# Altium PCB PCB1.PcbDoc
Units mm, origin at the board's own origin, x right, y up, seen from the top; angles counter-clockwise.
Board outline 65 x 50 mm, 2 copper layers (Top Layer, Bottom Layer), stack 1.58 mm thick; 67 components, 42 nets, 254 pads, 138 vias.
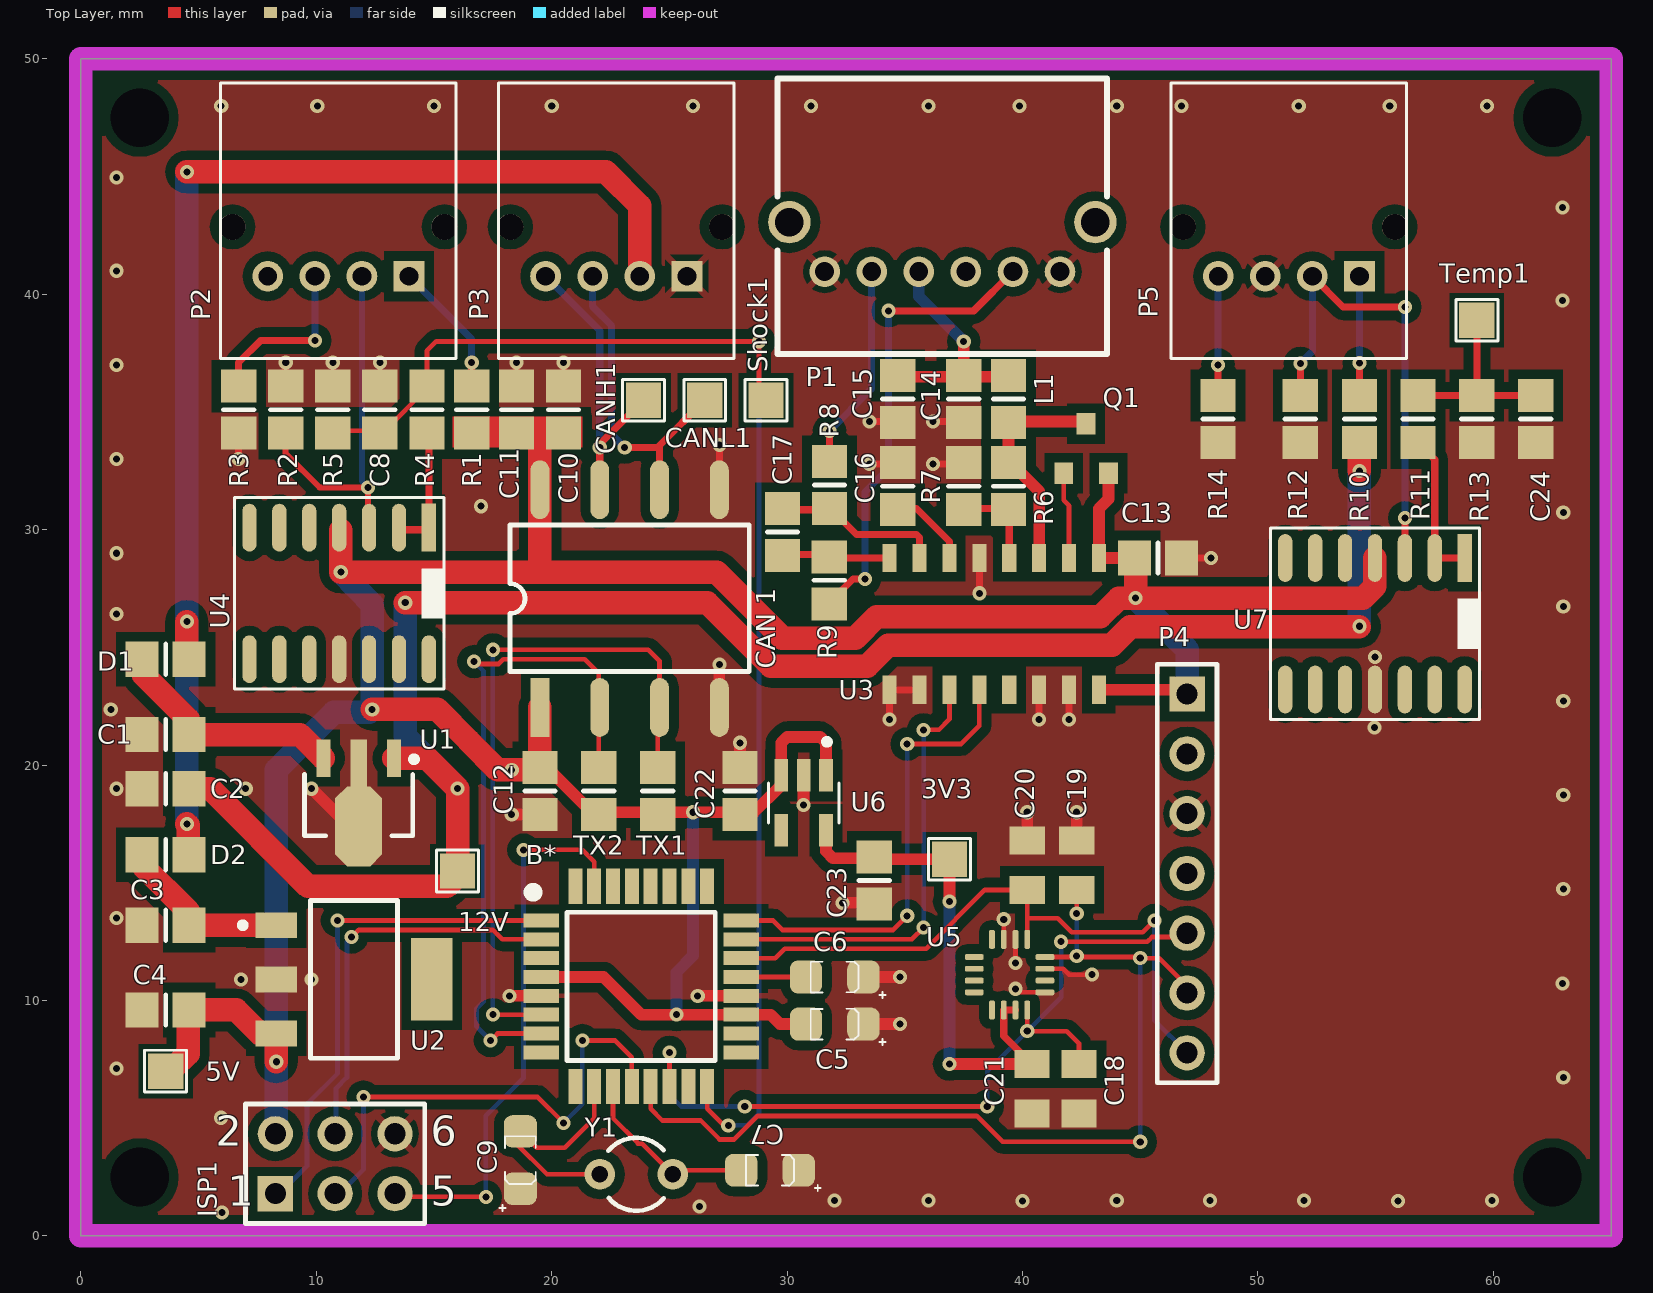
[diagram p0: Top Layer view]
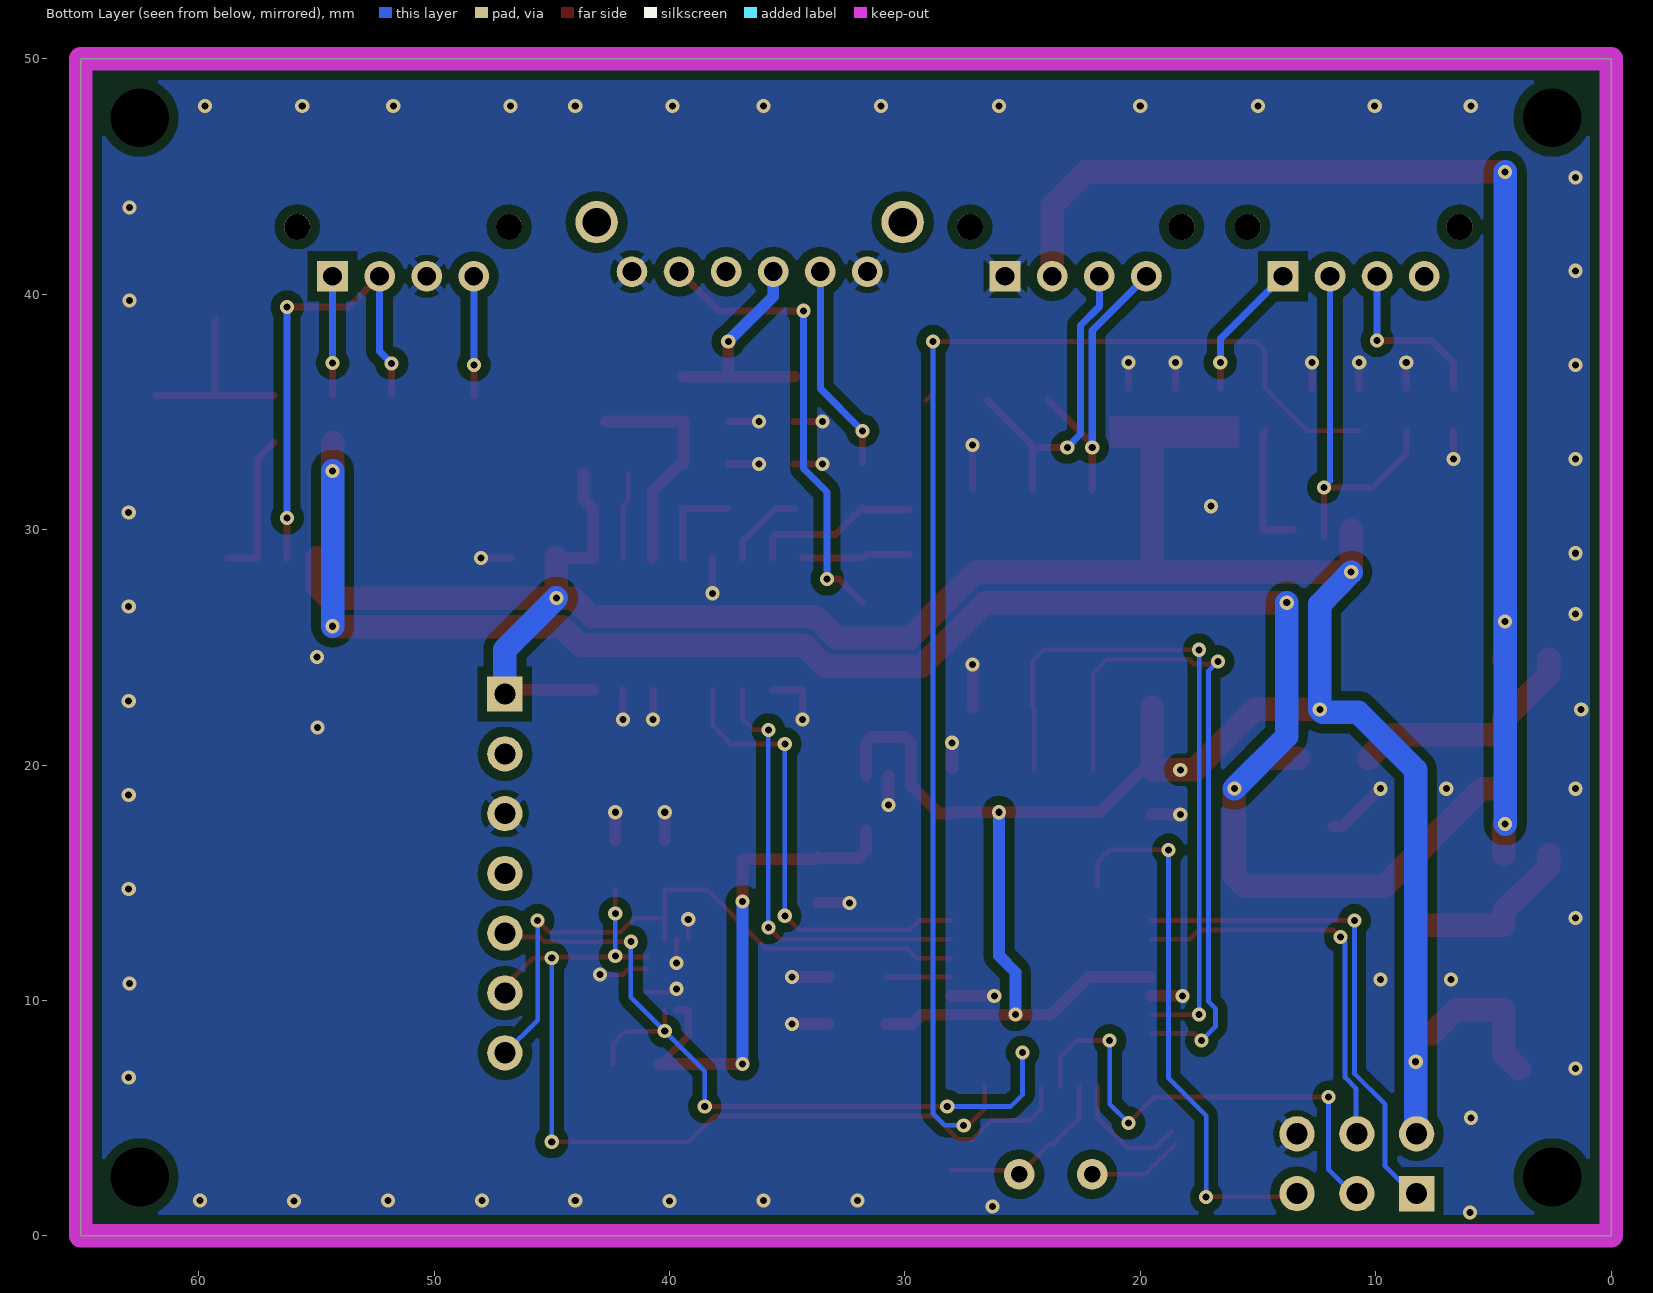
[diagram p1: Bottom Layer view, seen from below]

## Layer stack, top to bottom
Top Solder: solder mask 0.0102, Solder Resist, Dk 3.5
Top Layer: signal copper 0.0356
Dielectric 1: core 1.5086, FR-4, Dk 4.2
Bottom Layer: signal copper 0.0356
Bottom Solder: solder mask 0.0102, Solder Resist, Dk 3.5

## Board outline
0,0 65,0 65,50 0,50

## Design rules (kind name [scope] priority, off if disabled: settings)
BoardOutlineClearance [All] p1: gap=0.4 ignorepadtopadclearanceinfootprint=FALSE
Clearance Clearance_1 [InPolygon] p1: gap=0.4 ignorepadtopadclearanceinfootprint=TRUE
Clearance [All] p2: gap=0.2 ignorepadtopadclearanceinfootprint=FALSE
HoleSize [All] p1: absolutevalues=TRUE maxlimit=5 minlimit=0.025 maxpercent=80.000 minpercent=20.000
MinimumSolderMaskSliver [All] p1: minsoldermaskwidth=0.1
PolygonConnect [All] p1: thpad.connectstyle=Relief thpad.reliefconductorwidth=0.3 thpad.reliefentries=4 thpad.polygonreliefangle="45 Angle" thpad.airgapwidth=0.254 smdpad.connectstyle=Direct smdpad.reliefconductorwidth=0.254 smdpad.reliefentries=4 smdpad.polygonreliefangle="90 Angle" smdpad.airgapwidth=0.254 via.connectstyle=Direct via.reliefconductorwidth=0.254 via.reliefentries=4 via.polygonreliefangle="90 Angle" via.airgapwidth=0.254
RoutingVias [All] p1: holewidth=0.3 width=0.6 viastyle="Through Hole" minholewidth=0.3 minwidth=0.6 maxholewidth=0.3 maxwidth=0.6
SilkToSilkClearance [All] p1: silktosilkclearance=0.1
SilkToSolderMaskClearance [IsPad] p1: minsilkscreentomaskgap=0.1 clearancetoexposedcopper=TRUE
SolderMaskExpansion [All] p1: expansion=0.102
UnpouredPolygon [All] p1: allowunpoured=TRUE
Width [All] p1: maxlimit=1 minlimit=0.2 preferedwidth=0.5
25 further rules are at their usual default settings.

## Components (designator, comment, footprint, x,y, rotation, side; value= is the part's Value field where it differs from the comment)
3V3 "TP" SMD_TP 36.9,16 r0 top
5V "TP" SMD_TP 3.6,7 r90 top
12V "TP" SMD_TP 16,15.5 r270 top
B* "ATMEGA32M1" QFP80P900X900X120-32N 23.802,10.6 r0 top
C1 "0.33uF" 6-0805_M 3.6,21.3 r180 top
C2 "0.1uF" 6-0805_M 3.6,19 r180 top
C3 "0.22uF" 6-0805_M 3.6,13.2 r180 top
C4 "0.1uF" 6-0805_M 3.6,9.6 r180 top
C5 "Cap" CAP-0805 32.019,9 r270 top value=100nF
C6 "Cap" CAP-0805 32.019,11 r270 top value=10nF
C7 "Cap" CAP-0805 29.271,2.794 r270 top value=22pF
C8 "10nF" 6-0805_M 12.7,35.1 r90 top
C9 "Cap" CAP-0805 18.669,3.224 r180 top value=22pF
C10 "100nF" 6-0805_M 20.5,35.1 r90 top
C11 "1uF" 6-0805_M 18.5,35.1 r90 top
C12 "100nF" 6-0805_M 19.5,18.9 r270 top
C13 "0.1uF" 6-0805_M 45.75,28.8 r0 top
C14 "0.1uF" 6-0805_M 37.5,35.55 r270 top
C15 "0.1uF" 6-0805_M 34.7,35.55 r270 top
C16 "0.1uF" 6-0805_M 34.7,31.85 r270 top
C17 "0.1uF" 6-0805_M 29.8,29.9 r270 top
C18 "0.1uF" 0805_10MGAP 42.4,6.25 r270 top
C19 "0.1uF" 0805_10MGAP 42.3,15.75 r90 top
C20 "0.1uF" 0805_10MGAP 40.2,15.75 r90 top
C21 "0.1uF" 0805_10MGAP 40.4,6.25 r270 top
C22 "10uF" 6-0805_M 28,18.9 r90 top
C23 "10uF" 6-0805_M 33.7,15.1 r270 top
C24 "10nF" 6-0805_M 61.8,34.7 r270 top
"CAN 1" "ISO1050" ISO1050 19.5,22.45 r90 top
CANH1 "TP" SMD_TP 23.9,35.5 r90 top
CANL1 "TP" SMD_TP 26.5,35.5 r90 top
D1 "Diode" 6-0805_M 3.6,24.5 r180 top
D2 "Diode" 6-0805_M 3.6,16.2 r180 top
ISP1 "AVRISP-BOX" HDR2X3 8.26,1.8 r0 top
L1 "3.3uH" 6-0805_M 39.4,35.55 r270 top
P1 "S06B-PASK-2" JST_S06B-PASK-2 29.592,49.165 r0 top
P2 "S04B-PASK-2(LF)(SN)" JST_S04B-PASK-2(LF)(SN) 10.938,40.767 r0 top
P3 "S04B-PASK-2(LF)(SN)" JST_S04B-PASK-2(LF)(SN) 22.74,40.767 r0 top
P4 "Header 7" HDR1X7 46.99,23.02 r270 top
P5 "S04B-PASK-2(LF)(SN)" JST_S04B-PASK-2(LF)(SN) 51.31,40.767 r0 top
Q1 "MMBT4403" SOT23-3 42.7,33.4 r0 top
R1 "Res2" 6-0805_M 16.6,35.1 r270 top value=100R
R2 "Res2" 6-0805_M 8.7,35.1 r270 top value=470K
R3 "Res2" 6-0805_M 6.7,35.1 r90 top value=100R
R4 "Res2" 6-0805_M 14.7,35.1 r270 top value=6K8
R5 "Res2" 6-0805_M 10.7,35.1 r270 top value=12K
R6 "10K" 6-0805_M 39.4,31.85 r90 top
R7 "10K" 6-0805_M 37.5,31.85 r270 top
R8 "10K" 6-0805_M 31.8,31.9 r270 top
R9 "10K" 6-0805_M 31.792,27.85 r90 top
R10 "Res2" 6-0805_M 54.31,34.7 r270 top value=100R
R11 "" 6-0805_M 56.8,34.7 r270 top value=6K8
R12 "Res2" 6-0805_M 51.8,34.7 r90 top value=470K
R13 "Res2" 6-0805_M 59.3,34.7 r90 top value=12K
R14 "Res2" 6-0805_M 48.3,34.7 r90 top value=100R
Shock1 "TP" SMD_TP 29.1,35.5 r90 top
Temp1 "TP" SMD_TP 59.3,38.9 r90 top
TX1 "Res2" 6-0805_M 24.5,18.9 r270 top value=10K
TX2 "Res2" 6-0805_M 22,18.9 r270 top value=10K
U1 "L78L12ABUTR" SOT-89_M 11.8,18.3 r270 top
U2 "LM7805" SOT-223-2 11.6,10.9 r270 top
U3 "HX711" SO16 38.8,26 r180 top
U4 "TLV2464" SO14 14.78,30.088 r270 top
U5 "ADXL377" LFCSP16_LQ 39.45,11.1 r180 top
U6 "MIC5225-3.3" SOT95P280X145-5N 30.7,18.4 r270 top
U7 "TLV2464" SO14 58.78,28.8 r270 top
Y1 "XTAL = 8MHz" R38 23.596,2.62 r270 top

## Footprints (in the part's own frame and the unit in brackets; to place one, negate y for a bottom-side part, rotate by r counter-clockwise, add the part's x,y. Pads: shape width x height; smd on the part's side, far side on the other; paste and mask are expansions set on the pad)
6-0805_M [mm] "Chip Resistor, Body 2.0x1.2mm, IPC Low Density"
  rect 1.4x1.5 smd: 1(-1,0) 2(1,0)
  silkscreen extent 0,-0.65 0,0.65, body extent -1.07,-0.7 1.07,0.7, height 0.7
0805_10MGAP [mm]
  rect 1.2x1.5 smd: 1(-1.05,0) 2(1.05,0)
  body extent -1,-0.66 1,0.65, height 0.73
CAP-0805 [mil]
  rrect50% 55x54 smd: 1(0,48) 2(0,-48)
  silkscreen extent -26,-40 35,85, body extent -26,-40 26,40, height 22
HDR1X7 [mm] "Connector; Header; 7 Position"
  rect 1.5x1.5 hole 0.9: 1(0,0)
  round 1.5 hole 0.9: 2(2.54,0) 3(5.08,0) 4(7.62,0) 5(10.16,0) 6(12.7,0) 7(15.24,0)
  silkscreen extent -1.27,-1.27 16.51,1.27
HDR2X3 [mm] "Connector; Header; 3x2 Position"
  rect 1.5x1.5 hole 0.9: 1(0,0)
  round 1.5 hole 0.9: 2(0,2.54) 3(2.54,0) 4(2.54,2.54) 5(5.08,0) 6(5.08,2.54)
  silkscreen extent -1.27,-1.27 6.35,3.81
ISO1050 [mm] "ISO1050 Isolated Can Transceiver"
  rect 2.5x0.8 smd: 1(0,0)
  oval 2.5x0.8 smd: 2(0,-2.54) 3(0,-5.08) 4(0,-7.62) 5(9.25,-7.62) 6(9.25,-5.08) 7(9.25,-2.54) 8(9.25,0)
  silkscreen extent 1.52,-8.89 7.75,1.27, body extent 1.5,-8.9 7.7,1.3, height 5.08
JST_S04B-PASK-2(LF)(SN) [mm]
  rect 1.308x1.308 hole 0.8: 1(3,0)
  round 1.308 hole 0.8: 2(1,0) 3(-1,0) 4(-3,0)
  round 1.1 hole 1.1 unplated: None(-4.5,2.1) None(4.5,2.1)
  silkscreen extent -5,-3.5 5,8.2, body extent -4.93,-3.54 5.07,8.16, height 6.5
JST_S06B-PASK-2 [mm]
  round 1.3 hole 0.8: 1(2,-8.2) 2(4,-8.2) 3(6,-8.2) 4(8,-8.2) 5(10,-8.2) 6(12,-8.2)
  round 1.8 hole 1.2: 7(0.5,-6.1) 8(13.5,-6.1)
  silkscreen extent 0,-11.7 14,0, body extent 0.05,-11.68 14.05,0.02, height 6.5
LFCSP16_LQ [mil] "LFCSP16_LQ"
  rrect60% 31.5x9.84 smd: 1(-59.07,29.53) 2(-59.07,9.84) 3(-59.07,-9.84) 4(-59.07,-29.53) 9(59.07,-29.53) 10(59.07,-9.84) 11(59.07,9.84) 12(59.07,29.53)
  rrect60% 9.84x31.5 smd: 5(-29.53,-59.07) 6(-9.84,-59.07) 7(9.84,-59.07) 8(29.53,-59.07) 13(29.53,59.07) 14(9.84,59.07) 15(-9.84,59.07) 16(-29.53,59.07)
  body extent -60,-58 58,61, height 38
QFP80P900X900X120-32N [mm]
  rect 1.5x0.6 smd: 1(-4.25,2.8) 2(-4.25,2) 3(-4.25,1.2) 4(-4.25,0.4) 5(-4.25,-0.4) 6(-4.25,-1.2) 7(-4.25,-2) 8(-4.25,-2.8) 17(4.25,-2.8) 18(4.25,-2) 19(4.25,-1.2) 20(4.25,-0.4) 21(4.25,0.4) 22(4.25,1.2) 23(4.25,2) 24(4.25,2.8)
  rect 0.6x1.5 smd: 9(-2.8,-4.25) 10(-2,-4.25) 11(-1.2,-4.25) 12(-0.4,-4.25) 13(0.4,-4.25) 14(1.2,-4.25) 15(2,-4.25) 16(2.8,-4.25) 25(2.8,4.25) 26(2,4.25) 27(1.2,4.25) 28(0.4,4.25) 29(-0.4,4.25) 30(-1.2,4.25) 31(-2,4.25) 32(-2.8,4.25)
  silkscreen extent -4.8,-3.15 3.15,4.2, body extent -4.87,-4.73 4.73,4.87, height 1.13
R38 [mm] "Crystal, Thru-Hole; 2 Leads; Body 3.1 x 8.2 mm (Dia.xH)"
  round 1.3 hole 0.7: 1(0,1.55) 2(0,-1.55)
  silkscreen extent -1.55,-1.19 1.55,1.17
SMD_TP [mm]
  rect 1.5x1.5 smd: 1(0,0)
  silkscreen extent -0.89,-0.89 0.89,0.89
SO14 [mil]
  rect 80x24 smd: 1(0,0)
  oval 80x24 smd: 2(0,-50) 3(0,-100) 4(0,-150) 5(0,-200) 6(0,-250) 7(0,-300) 8(220,-300) 9(220,-250) 10(220,-200) 11(220,-150) 12(220,-100) 13(220,-50) 14(220,0)
  silkscreen extent -50,-325 270,26, body extent -20,-325 240,25, height 61
SO16 [mm] "SO16"
  rect 0.6x1.2 smd: 1(-4.445,-2.8) 2(-3.175,-2.8) 3(-1.905,-2.8) 4(-0.635,-2.8) 5(0.635,-2.8) 6(1.905,-2.8) 7(3.175,-2.8) 8(4.445,-2.8) 9(4.445,2.8) 10(3.175,2.8) 11(1.905,2.8) 12(0.635,2.8) 13(-0.635,2.8) 14(-1.905,2.8) 15(-3.175,2.8) 16(-4.445,2.8)
  body extent -4.98,-3.34 5.02,3.36, height 1.52
SOT23-3 [mil] "SOT23-3"
  rect 31.5x35.43 smd: 1(-37.4,-39.37) 2(37.4,-39.37) 3(0,43.31)
  body extent -54,-53 60,57, height 51
SOT95P280X145-5N [mm]
  rect 1.39x0.58 smd: 1(-1.165,0.95) 2(-1.165,0) 3(-1.165,-0.95) 4(1.165,-0.95) 5(1.165,0.95)
  silkscreen extent -2.69,-1.5 0.85,1.5, body extent -1.12,-1.5 1.38,1.5, height 1.06
SOT-89_M [mm] "SOT89, 3-Leads, Body 4.5x2.4 mm, Pitch 1.5mm, Lead Span 4.1mm, IPC Low Density"
  rect 1.6x0.6 smd: 1(-2,1.5) 3(-2,-1.5)
  rect 2x0.7 smd: 2(-1.8,0)
  oct 3.4x2 smd: 2(0.9,0)
  silkscreen extent -2.07,-2.3 1.3,2.48, body extent -1.3,-2.3 1.3,2.3, height 1.6
SOT-223-2 [mm] "SOT-223/SC-73; 4 Leads; Body 6.7 x 7.3 mm, inc. leads (LxW max)"
  rect 1.1x1.75 smd: 1(-2.3,-3.3) 2(0,-3.3) 3(2.3,-3.3)
  rect 3.5x1.75 smd: 4(0,3.3)
  silkscreen extent -3.35,-4.85 3.35,1.85, body extent -3.35,-3.7 3.35,3.5, height 1.85

## Part data
3V3 5V 12V CANH1 CANL1 Shock1 Temp1: library part Plug, "Test Point", LatestRevisionDate=17-Jul-2002, LatestRevisionNote="Re-released for DXP Platform.", Publisher="Altium Limited"
C1 C2 C3 C4 C13 C14 C15 C16 C17 C22 C23: library part CAP_CERAMIC0805-NOOUTLINE, "Ceramic CapacitorsFor new designs, use the packages preceded by an '_' character since they are more reliable:The following footprints should be used on most boards:For extremely tight-pitch boards where space is at a premium, the following 'micro-pitch' footprints can be used (smaller pads, no silkscreen outline, etc.):", DeviceName=0805-NOOUTLINE, DeviceSetName=CAP_CERAMIC, GateName_1=G$1, LibraryName=microbuilder, SymbolName_1=CAPACITOR
C5 C6 C7 C9: "Capacitor", LatestRevisionDate=17-Jul-2002, LatestRevisionNote="Re-released for DXP Platform.", PackageDescription="Radial Cap, Thru-Hole; 2 Leads; 0.3 in Pin Spacing", PackageReference=RAD-0.3, Published=8-Jun-2000, Publisher="Altium Limited"
C8 C10 C11 C12 C24: library part "Cap Pol3", "Polarized Capacitor (Surface Mount)", LatestRevisionDate=29-May-2009, LatestRevisionNote="IPC-7351 Footprint Added.", PackageDescription="Chip Capacitor", PackageReference=C0805, Published=8-Jun-2000, Publisher="Altium Limited"
C18 C19 C20 C21: library part CAP_CERAMIC0805_10MGAP, "Ceramic CapacitorsFor new designs, use the packages preceded by an '_' character since they are more reliable:The following footprints should be used on most boards:For extremely tight-pitch boards where space is at a premium, the following 'micro-pitch' footprints can be used (smaller pads, no silkscreen outline, etc.):", DeviceName=0805_10MGAP, DeviceSetName=CAP_CERAMIC, GateName_1=G$1, LibraryName=microbuilder, SymbolName_1=CAPACITOR
"CAN 1": "ISO1050 Isolated Can Transceiver", Supplier Part Number 1=1755712, Supplier 1=Farnell
D1 D2: "Default Diode", Code_JEDEC=DO-214-AB, LatestRevisionDate=17-Jul-2002, LatestRevisionNote="Re-released for DXP Platform.", PackageDescription="DO-214-AB/SMC; 2 C-Bend Leads; Body 7.9 x 5.9 mm, inc. leads (LxW)", PackageReference=SMC, PackageVersion=Sep-1996, Published=8-Jun-2000, Publisher="Altium Limited"
ISP1: "AVR ISP HEADERStandard 6 pin header for AVR programming", Colour=Black, Manufacturer="Wurth Electronics", Manufacturer Part Number=61200621621, Supplier Part Number 1=710-61200621621, ComponentLink1Description=https://datasheet.ciiva.com/28391/76595-28391937.pdf, ComponentLink1URL=https://datasheet.ciiva.com/28391/76595-28391937.pdf, Connector Type="Male Pin", Contact Material=Copper, Contact Plating=Gold, DeviceName=-BOX, DeviceSetName=AVRISP, GateName_1=G$1, Gender=Male, LibraryName=adafruit, Mount="Through Hole", Number of Contacts=6, Number of Positions=6, Number of Rows=2, Packaging=Tray, Pitch=0.1inch, Pricing 1="1=0.82, 10=0.74, 50=0.62, 100=0.535, 1000=0.366, 10000=0.366 (USD)", REACH SVHC=Unknown, Row Spacing=0.1inch, Stock 1=708, Supplier 1=Mouser, SymbolName_1=AVRISP, Termination=Solder
L1: library part INDUCTOR0805-IND, "InductorsBasic Inductor/Choke - 0603 and 1206. Footprints are not proven and vary greatly between part numbers.INDUCTOR POWER 3.3UH 4.0A SMD0.197\" L x 0.197\" W x 0.177\" H (5.00mm x 5.00mm x 4.50mm)", DeviceName=0805-IND, DeviceSetName=INDUCTOR, GateName_1=G$1, LibraryName=SparkFun-Passives, PROD_ID=NDUC-13076, SymbolName_1=INDUCTOR
P1: library part JST-S06B-PASK-2, "JST (JAPAN SOLDERLESS TERMINALS) - S06B-PASK-2 - HEADER, PA, 6WAY, SIDE, 2MM", Manufacturer_Name="JST (JAPAN SOLDERLESS TERMINALS)", Arrow Part Number=S06B-PASK-2, Datasheet Link=https://www.google.at/url?sa=t&rct=j&q=&esrc=s&source=web&cd=4&cad=rja&uact=8&ved=0ahUKEwjPh4aswZ_QAhUCbRQKHeV_BDkQFggvMAM&url=http%3A%2F%2Fwww.jst-mfg.com%2Fproduct%2Fpdf%2Feng%2FePA-F.pdf&usg=AFQjCNHIjr6tw3q-UCZFm2uwsNkZVsuEmQ&sig2=Xvk6c_Ei4q2HSUHpQHCoT, Manufacturer_Part_Number=S06B-PASK-2
P2 P3 P5: library part JST-S04B-PASK-2(LF)(SN), "PA Series 4 Position 2.0mm Through Hole Wire to Board Single Row Shrouded Header", Package=None, Availability=Good, MF=JST, MP=S04B-PASK-2_LF__SN_, Price="0.28 USD", SnapEDA_Link=https://www.snapeda.com/parts/S04B-PASK-2%2528LF%2529%2528SN%2529/JST%2520Sales%2520America%2520Inc/view-part/?ref=snap
P4: "Header, 7-Pin", LatestRevisionDate=17-Jul-2002, LatestRevisionNote="Re-released for DXP Platform.", Publisher="Altium Limited"
Q1: library part TRANSISTOR_PNPMMBT4403, "Generic PNP BJT  Double check pinouts against datasheets- not all devices are the same!MMBT3906 - 40V 200mA SOT-23 (TRANS-08052)MMBT4403 - 40V 600mA SOT-23 (TRANS-09245)", DeviceName=MMBT4403, DeviceSetName=TRANSISTOR_PNP, GateName_1=G$1, LibraryName=SparkFun-DiscreteSemi, PROD_ID=TRANS-09245, SymbolName_1=PNP
R1 R2 R3 R4 R5 R10 R12 R13 R14 TX1 TX2: "Resistor", LatestRevisionDate=17-Jul-2002, LatestRevisionNote="Re-released for DXP Platform.", PackageDescription="Axial Device, Thru-Hole; 2 Leads; 0.4 in Pin Spacing", PackageReference=AXIAL-0.4, Published=8-Jun-2000, Publisher="Altium Limited"
R6 R7 R8 R9: library part RESISTOR0805_NOOUTLINE, "ResistorsFor new designs, use the packages preceded by an '_' character since they are more reliable:The following footprints should be used on most boards:For extremely tight-pitch boards where space is at a premium, the following 'micro-pitch' footprints can be used (smaller pads, no silkscreen outline, etc.):", DeviceName=0805_NOOUTLINE, DeviceSetName=RESISTOR, GateName_1=G$1, LibraryName=microbuilder, SymbolName_1=RESISTOR
R11: library part Res2, "Resistor", LatestRevisionDate=17-Jul-2002, LatestRevisionNote="Re-released for DXP Platform.", PackageDescription="Axial Device, Thru-Hole; 2 Leads; 0.4 in Pin Spacing", PackageReference=AXIAL-0.4, Published=8-Jun-2000, Publisher="Altium Limited"
U1: "Positive Voltage Regulator, 12V, 4-Pin SOT-89, Tape and Reel", Case/Package=SOT-89, Dropout Voltage=1.7V, Manufacturer=STMicroelectronics, Max Input Voltage=35V, Max Operating Temperature=125°C, Max Output Current=100mA, Min Input Voltage=14V, Min Operating Temperature=-40°C, Min Output Voltage=12V, Package Quantity=1, Power Supply Rejection Ratio (PSRR)=42dB, Quiescent Current=6.5mA, Supplier Part Number 1=497-7768-2-ND, ComponentLink1Description="Manufacturer URL", ComponentLink1URL=http://www.st.com, ComponentLink2Description=Datasheet, ComponentLink2URL=http://www.st.com/internet/com/TECHNICAL_RESOURCES/TECHNICAL_LITERATURE/DATASHEET/CD00000446.pdf, DatasheetVersion=1/02/2011, Height=1.6mm, Lead Free="Lead Free", Length=4.6mm, Manufacturer Part Number=L78L12ABUTR, Mount="Surface Mount", Nominal Output Voltage=12V, Number of Outputs=1, Number of Pins=3, Number of Regulators=1, Output Current=100mA, Output Type=Fixed, Output Voltage=12V, PackageDescription="3-Pin SOT-89 Package 1.5 mm Pitch, 4.1 mm Lead Span", PackageReference=SOT-89, PackageVersion=2011, Packaging="Tape and Reel", PartNumber=L78L12ABUTR, Polarity=Positive, Radiation Hardening=No, REACH SVHC="No SVHC", Stock 1=15000, Supplier 1=Digi-Key, Width=2.6mm
U2: library part LM78XX, "LM340, LM340A and LM7805 Family Wide VIN 1.5-A Fixed Voltage Regulators The LM340 and LM7805 Family monolithic 3-terminal / positive voltage regulators employ internal currentlimiting, / thermal shutdown and safe-area / compensation, making them essentially indestructible.", Dropout Voltage=2V, Manufacturer="Texas Instruments", Manufacturer Part Number=LM7805MPNOPB, Max Operating Temperature=125°C, Min Operating Temperature=0°C, Quiescent Current=8mA, Supplier Part Number 1=296-44517-6-ND, ComponentLink1Description=datasheet, ComponentLink1URL=http://www.ti.com/lit/ds/symlink/lm340.pdf, Lead Free="Contains Lead", Pricing 1="1=1.36, 10=1.215, 100=0.9476, 500=0.7828 (USD)", Stock 1=1295, Supplier="Element 14", Supplier 1=Digi-Key, Supplier Code=2078564
U3: library part HX711HX711, ComponentLink1Description=Datasheet, ComponentLink1URL=https://www.mouser.com/ds/2/813/hx711_english-1022875.pdf, DeviceName=HX711, DeviceSetName=HX711, GateName_1=U1, LibraryName=Testing, PROD_ID=IC-12445, SymbolName_1=HX711
U4 U7: library part LM324, "Low Power Quad Operational Amplifier", Current - Input Bias=50pA, Current - Output / Channel=-, Current - Supply=8mA, Manufacturer="Texas Instruments", Manufacturer Part Number=LF347BD, Operating Temperature="0°C ~ 70°C", Package / Case="14-SOIC (3.9mm Width), 14-SOL", Supplier Part Number=296-7136-5-ND, Voltage - Input Offset=3000µV, Voltage - Supply, Single/Dual (±)="7 V ~ 36 V, ±3.5 V ~ 18 V", Amplifier Type=J-FET, Category="Integrated Circuits (ICs)", Gain Bandwidth Product=3MHz, Number of Circuits=4, Output Type=-, Packaging=Tube, RoHS="RoHS Compliant", Slew Rate="13 V/µs", Supplier=Digi-Key, Supplier 1=Digi-Key, Supplier Part Number 1=296-7136-5-ND, Text Field1=pristel=Nsc\nsanopea\<parttype>.ckt
U5: library part ACCEL_ADXL377, "ADXL377 +/-200g 3-Axis Analog Accelerometer", Manufacturer="Analog Devices", Manufacturer Part Number=ADXL377BCPZ-RL7, Max Operating Temperature=85°C, Max Supply Voltage=3.6V, Min Operating Temperature=-40°C, Min Supply Voltage=1.8V, Nominal Supply Current=300uA, Package Quantity=1, Supplier Part Number 1=ADXL377BCPZ-RL7DKR-ND, Temp=Temp:, -3db Bandwidth=1.6kHz, -40-85°C=-40-85°C, 1.8-3.6V=1.8-3.6V, ADXL3773-Axis+-200g="ADXL377 3-Axis +-200g", AnalogAccelerometer="Analog Accelerometer", Axis="X, Y, Z", Bandwidth=0.5Hz, ComponentLink1Description=https://datasheet.ciiva.com/6483/adxl377-6483845.pdf, ComponentLink1URL=https://datasheet.ciiva.com/6483/adxl377-6483845.pdf, ComponentLink2Description=https://datasheet.ciiva.com/6483/adxl377-6483848.pdf, ComponentLink2URL=https://datasheet.ciiva.com/6483/adxl377-6483848.pdf, ComponentLink3Description=https://datasheet.ciiva.com/6951/1670806-6951736.pdf, ComponentLink3URL=https://datasheet.ciiva.com/6951/1670806-6951736.pdf, ComponentLink4Description=https://datasheet.ciiva.com/7622/1670806-7622120.pdf, ComponentLink4URL=https://datasheet.ciiva.com/7622/1670806-7622120.pdf, ComponentLink5Description=https://datasheet.ciiva.com/6483/adxl377-6483849.pdf, ComponentLink5URL=https://datasheet.ciiva.com/6483/adxl377-6483849.pdf, DeviceSetName=ACCEL_ADXL377, GateName_1=G$1, Lead Free="Contains Lead", LibraryName=microbuilder, Number of Pins=16, Operating Supply Current=300uA, Output Type=Analog, Packaging="Tape and Reel", Pricing 1="1=11.47, 10=10.359, 100=8.576, 500=7.4679 (USD)", REACH SVHC="No SVHC", Sensitivity=6.5mV/g, Stock 1=13329, Supplier 1=Digi-Key, SymbolName_1=ADXL377, VCC=VCC:
U6: library part VREG_SOT23-5, "SOT23-5 Fixed Voltage RegulatorsPartCurrent OutV OutV InV DropoutθJA (°C/W)TJ (°C)Digikey Part No.  ADP121  150mA  3.3V  3.4-5.5V  0.09V @ 150mA  --  --  ADP121-AUJZ33R7CT-ND  ADP121  150mA  3.0V  3.1-5.5V  0.09V @ 150mA  --  --  ADP121-AUJZ30R7CT-ND  ADP122     300mA  3.3V  3.4-5.5V  0.085V @ 300mA  --  --  ADP122AUJZ-3.3-R7CT-ND  ADP1712     300mA  3.3V  3.5-5.5V  0.17V @ 300mA  --  --  ADP1712AUJZ-3.3-R7TR-ND  AP7311 (Low Cost)  150mA  3.3V  3.5-6V  0.15V @ 150mA  --  --  AP7311-33WG-7DICT-ND  LD39015M18R  150mA  1.8V  1.9V-5.5V  0.08V @ 100mA  --  --  497-6977-1-ND  LP2985A-33DBVR  150mA  3.3V  3.3-16V  0.28V @ 150mA  206  150  296-18479-1-ND  MCP1824T-3302E/OT  300mA  3.3V  3.5V-6V  0.2V @ 300mA  --  --  MCP1824T-3302E/OTCT-ND  MIC5205-2.5YM5 TR  150mA  2.5V  2.7-16V  0.165V @ 150mA  --  --  576-1257-2-ND  MIC5205-3.0YM5 TR  150mA  3.0V  3.2V-16V  0.165V @ 150mA  --  --  576-1258-2-ND  MIC5205-3.3YM5 TR  150mA  3.3V  3.5V-16V  0.165V @ 150mA  --  --  576-1259-2-ND  TPS780330220  150mA  3.3V+2.2V  3.6-5.5V  250mV Max  --  --  296-23332-1-ND  TDA3663/N1,135  100mA  3.3V  3.5-45V  0.18V @ 50mA  --  --  568-5343-1-ND                                Max operating temp can be calculated using θJA, TJ (max junction temperature), and power in watts.  Set the \"Maximum Ambient Temperature\" until it reaches TJ (\"Max Junction Temperature\"), which is the absolute limit for safe use of the regulator: Heat Sink Temperature CalculatorFor example, With 12V source into a 3.3V LP2985 and a 30mA load, we are dissipating (12V-3.3V) * 0.03A = 0.261W.  With a θJA of 206 °C/W, a TJ of 150°C, and 261mW we can safely use the chip without a heat sink up to 75°C (=147.1°C Junction Temperature).", Case/Package=SOT-23-5, Dropout Voltage=310mV, Manufacturer="Microchip Micrel", Manufacturer Part Number=MIC5225-3.3YM5TR, Max Input Voltage=16V, Max Operating Temperature=125°C, Max Output Current=150mA, Min Input Voltage=2.3V, Min Operating Temperature=-40°C, Min Output Voltage=3.3V, Package Quantity=3000, Reference Voltage=1.24V, Supplier Part Number 1=576-2980-1-ND, Accuracy=2%, ComponentLink1Description=https://datasheet.ciiva.com/2042/mic5225-2042949.pdf, ComponentLink1URL=https://datasheet.ciiva.com/2042/mic5225-2042949.pdf, ComponentLink2Description=https://datasheet.ciiva.com/2042/mic5225-2042950.pdf, ComponentLink2URL=https://datasheet.ciiva.com/2042/mic5225-2042950.pdf, ComponentLink3Description=https://datasheet.ciiva.com/2042/mic5225-2042951.pdf, ComponentLink3URL=https://datasheet.ciiva.com/2042/mic5225-2042951.pdf, ComponentLink4Description=https://datasheet.ciiva.com/16217/mic5225-16217018.pdf, ComponentLink4URL=https://datasheet.ciiva.com/16217/mic5225-16217018.pdf, DeviceSetName=VREG_SOT23-5, GateName_1=G$1, Height=1.1mm, Lead Free="Lead Free", Length=2.9mm, LibraryName=microbuilder, Mount="Surface Mount", Nominal Output Voltage=3.3V, Number of Outputs=1, Number of Pins=5, Number of Regulators=1, Output Current=150mA, Output Type=Fixed, Output Voltage=3.3V, Packaging="Tape and Reel", Pricing 1="1=0.4, 25=0.3296, 100=0.2987 (USD)", REACH SVHC="No SVHC", Stock 1=10162, Supplier 1=Digi-Key, SymbolName_1=VREG_SOT23-5, Width=1.6mm
Y1: library part XTAL, "Crystal Oscillator", LatestRevisionDate=17-Jul-2002, LatestRevisionNote="Re-released for DXP Platform.", PackageDescription="Crystal, Thru-Hole; 2 Leads; Body 3.1 x 8.2 mm (Dia.xH)", PackageReference=R38, Published=8-Jun-2000, Publisher="Altium Limited"

## Free pads (board coordinates)
  round 2 hole 2.5: 1(2.5,2.5) 1(2.5,47.5)
  round 2 hole 2.5 unplated: 1(62.5,2.5) 1(62.5,47.5)

## Via types
v1: diameter 0.6, hole 0.3, Top Layer to Bottom Layer, tented both sides, 138 vias

## Nets (pads, with @x,y where several pads share a name; then routed paths per layer and width w, separated by ;. In a path a pad name is that pad's centre, name@x,y a point inside that pad or via, vN(x,y) a via of type N, cw(c..) or ccw(c..) an arc to the next point about the centre after c; other vN are vias at no path point)
+3V3: 3V3.1 C21.1 C23.1 U5.14 U5.15 U6.5 | length 21.8
  Top Layer w0.3: U5.15 U5.14 39.2,8.5 C21.1
  Top Layer w0.5: U6.5 31.65,16.342 31.942,16.05 C23.1@33.7,16.05 ; C23.1 33.8,16 3V3.1 v1(36.9,14.2) ; v1(36.9,7.3) C21.1
  Bottom Layer w0.5: v1(36.9,7.3) v1(36.9,14.2)
+5V: 5V.1 "CAN 1.1" "CAN 1.8" B*.4 B*.19 C4.1 C5.2 C10.1 C11.1 C12.1 C13.1 C22.1 ISP1.2 P4.1 Q1.2 R1.2 TX1.2 TX2.2 U2.3 U3.1 U3.16 U4.4 U6.1 U6.3 U7.4 | length 157.7
  Top Layer w0.5: C12.1@19.5,19.8 19.9,19.8 21.7,18 v1(26,18) 27.95,18 28,17.95 28.55,17.95 29.75,19.15 U6.3 29.75,20.95 30,21.2 31.4,21.2 31.65,20.95 U6.1 ; B*.4 22.2,11 23.8,9.4 v1(25.3,9.4) B*.19 29.3,9.4 29.7,9 C5.2 ; U3.16 46.81,23.2 P4.1 ; Q1.2 43.65,31.3 43.245,30.895 U3.1 C13.1 C13.1@44.8,28.8
  Top Layer w1: 5V.1@3.9,7.1 4.55,7.75 4.55,9.6 C4.1 6.6,9.6 7.6,8.6 U2.3 v1(8.3,7.4) ; U4.4@11.04,29.97 v1(11.04,28.2) 19.5,28.2 ; v1(12.374,22.37) 15.145,22.37 16.475,21.04 16.475,21.025 17.7,19.8 v1(18.3,19.8) 19.5,19.8 C12.1 19.5,22.45 ; R1.2@16.6,34.2 19.552,34.2 19.5,34.148 19.5,31.7 19.5,28.2 ; C13.1@44.8,28.8 v1(44.8,27.1) ; U7.4 54.97,27.6 54.454,27.084 44.816,27.084 v1(44.8,27.1) ; 19.5,28.2 27,28.2 29.8,25.4 32.9,25.4 33.8,26.3 43.303,26.3 44.087,27.084 44.784,27.084 v1(44.8,27.1)
  Bottom Layer w0.5: v1(25.3,9.4) 25.3,11.2 26,11.9 v1(26,18)
  Bottom Layer w1: ISP1.2@8.3,4.2 v1(8.3,7.4) 8.3,19.8 10.749,22.249 12.253,22.249 v1(12.374,22.37) 12.374,26.826 v1(11.04,28.2) ; v1(44.8,27.1) 46.99,24.91 P4.1
+12V: 12V.1 C2.1 R10.2 U1.1 | length 79.2
  Top Layer w1: C2.1 5.5,19 9.65,14.85 15.55,14.85 16,15.3 12V.1 v1(16,19.003) 14.703,20.3 U1.1 ; v1(13.778,26.9) 26.603,26.9 29.303,24.2 33.397,24.2 34.297,25.1 43.8,25.1 44.584,25.884 v1@54.31,25.884 ; v1(54.31,32.5) R10.2
  Bottom Layer w1: v1(13.778,26.9) 13.778,21.225 v1(16,19.003) ; v1(54.31,25.9) v1(54.31,32.5)
+V_Shock: P2.1 R1.1 | length 5.9
  Top Layer w0.3: R1.1@16.6,36 R1.1 v1(16.6,37.1)
  Bottom Layer w0.3: P2.1 16.6,38.105 v1(16.6,37.1)
+V_Temp: P5.1 R10.1 | length 5.1
  Top Layer w0.3: R10.1 v1(54.31,37.079)
  Bottom Layer w0.3: v1(54.31,37.079) P5.1
-V_Shock: P2.3 R3.2 | length 7.5
  Top Layer w0.3: R3.2@6.7,36 6.7,37.1 7.638,38.038 v1(9.938,38.038)
  Bottom Layer w0.3: v1(9.938,38.038) P2.3
-V_Temp: P5.4 R14.2 | length 5.1
  Top Layer w0.3: v1(48.3,37) R14.2 R14.2@48.31,35.71
  Bottom Layer w0.3: v1(48.3,37) 48.3,40.757 P5.4
A+_Green_BLUE: P1.5 R9.1 | length 19.7
  Top Layer w0.3: R9.1@31.792,26.9 32.792,27.9 v1(33.3,27.9) ; v1(34.3,39.3) 37.927,39.3 P1.5
  Bottom Layer w0.3: v1(33.3,27.9) 33.3,31.6 34.3,32.6 v1(34.3,39.3)
A-_White: P1.2 R8.1 | length 8.9
  Top Layer w0.3: R8.1@31.8,32.85 R8.1 v1(31.8,34.2)
  Bottom Layer w0.3: v1(31.8,34.2) 33.592,35.992 P1.2
CAN_RXD: "CAN 1.2" B*.7 TX2.1 | length 28.7
  Top Layer w0.2: v1(16.7,24.4) 16.8,24.3 17.749,24.3 17.949,24.5 21.4,24.5 22,23.9 TX2.1 TX2.1@22,19.8 ; v1(17.4,8.3) 17.7,8.6 B*.7
  Bottom Layer w0.2: v1(16.7,24.4) 17.1,24 17.1,9.949 16.8,9.649 16.8,8.9 v1(17.4,8.3)
CAN_TXD: "CAN 1.3" B*.6 TX1.1 | length 29.5
  Top Layer w0.2: v1(17.5,9.4) B*.6 ; v1(17.5,24.9) 24.1,24.9 24.58,24.42 24.58,22.45 24.5,22.37 TX1.1 TX1.1@24.5,19.8
  Bottom Layer w0.2: v1(17.5,9.4) v1(17.5,24.9)
CANH: "CAN 1.7" CANH1.1 P3.4 | length 12.8
  Top Layer w0.3: 22.04,31.7 v1(22.04,33.5) 22.04,33.64 CANH1.1
  Bottom Layer w0.3: P3.4 22.04,38.467 v1(22.04,33.5)
CANL: "CAN 1.6" CANL1.1 P3.3 | length 13.9
  Top Layer w0.3: v1(23.1,33.5) 24.58,33.5 ; 24.58,31.7 24.58,33.5 ; CANL1.1 24.58,33.58 24.58,33.5
  Bottom Layer w0.3: P3.3 21.74,39.474 22.54,38.674 22.54,34.06 v1(23.1,33.5)
E+_RED: C14.1 C15.1 L1.1 P1.3 | length 10
  Top Layer w0.5: C15.1@34.7,36.5 C14.1@37.5,36.5 ; v1(37.5,38) C14.1 C14.1@37.5,36.5 ; L1.1@39.4,36.5 C14.1@37.5,36.5
  Bottom Layer w0.5: P1.3 35.592,39.908 v1(37.5,38)
GND: "CAN 1.4" "CAN 1.5" B*.5 B*.20 C1.2 C2.2 C3.2 C4.2 C5.1 C6.1 C7.1 C8.2 C9.1 C10.2 C11.2 C12.2 C13.2 C14.2 C15.2 C16.1 C18.2 C19.2 C20.2 C21.2 C22.2 C23.2 C24.2 ISP1.6 P1.1 P1.6 P3.1 P4.3 P5.3 R2.1 R3.1 R5.1 R7.1 R12.1 R13.1 R14.1 U1.2 U2.2 U3.5 U3.9 U3.10 U3.14 U3.15 U4.11 U5.1 U5.3 U5.6 U5.7 U6.2 U7.11 | length 44.8
  Top Layer w0.2: U5.7 v1(39.2,13.451) ; v1(39.7,10.5) 39.85,10.35 U5.1 ; v1(39.7,11.6) U5.6 ; U5.3 41.725,11.35 41.975,11.1 v1(42.95,11.1)
  Top Layer w0.3: v1(6.7,33) R3.1@6.7,34.2 ; R2.1@8.7,36 v1(8.7,37.1) ; R5.1@10.7,36 v1(10.7,37.1) ; C8.2@12.7,36 v1(12.7,37.1) ; C11.2@18.5,36 v1(18.5,37.1) ; C10.2@20.5,36 C10.2 v1(20.5,37.1) ; 27.12,31.7 v1(27.12,33.6) ; v1(33.5,32.8) C16.1@34.7,32.8 ; v1(33.5,34.6) C15.2@34.7,34.6 ; v1(34.355,21.945) U3.9 U3.10 ; v1(36.2,32.8) R7.1@37.5,32.8 ; v1(36.2,34.6) C14.2@37.5,34.6 ; v1(38.165,27.3) U3.5 ; v1(40.705,21.945) U3.14 ; v1(41.975,21.945) U3.15 ; C13.2@46.7,28.8 C13.2 v1(48,28.8)
  Top Layer w0.5: v1(9.8,19) 11.4,17.4 U1.2@11.8,17.4 ; v1(18.2,10.2) B*.5 ; v1(18.3,17.9) C12.2 ; v1(26.2,10.2) B*.20 ; 27.12,22.45 v1(27.12,24.28) ; C22.2@28,19.85 C22.2 v1(28,20.95) ; v1(30.7,18.3) U6.2 ; v1(32.35,14.15) C23.2@33.7,14.15 ; C5.1 v1(34.8,9) ; C6.1 v1(34.8,11) ; C20.2 v1(40.2,18) ; C19.2 v1(42.3,18)
  other v1: 6,1 26.274,1.254 32.016,1.508 36,1.508 40,1.486 44,1.508 47.964,1.508 51.948,1.508 55.948,1.486 59.948,1.508 5.954,5.02 62.97,6.736 1.508,7.112 62.931,10.73 6.8,10.9 9.8,10.9 1.508,13.5 62.97,14.744 62.97,18.73 1.508,19 7,19 54.952,21.6 1.27,22.37 62.97,22.73 54.97,24.6 1.508,26.416 62.97,26.743 1.508,29 62.97,30.73 17,31 1.508,33 1.508,37 62.931,39.73 1.508,41 62.931,43.695 1.508,44.965 5.959,48 10.042,48 14.992,48 20,48 26,48 31.019,48 36,48 39.866,48 44,48 46.75,48 51.731,48 55.597,48 59.731,48
HX_DAT: B*.24 U3.12 | length 19.7
  Top Layer w0.2: B*.24 29.4,13.4 29.8,13 34.5,13 v1(35.1,13.6) ; v1(35.1,20.9) 37.4,20.9 38.165,21.665 U3.12
  Bottom Layer w0.2: v1(35.1,13.6) v1(35.1,20.9)
HX_SCK: B*.23 U3.11 | length 18.9
  Top Layer w0.2: B*.23 35.3,12.6 v1(35.8,13.1) ; v1(35.8,21.5) 36.45,21.5 36.895,21.945 U3.11
  Bottom Layer w0.2: v1(35.8,13.1) v1(35.8,21.5)
MISO: B*.1 ISP1.1 | length 21.5
  Top Layer w0.2: v1(10.9,13.4) B*.1
  Bottom Layer w0.2: ISP1.1@8.3,1.66 9.6,2.96 9.6,5.6 10.9,6.9 v1(10.9,13.4)
MOSI: B*.2 ISP1.4 | length 17.1
  Top Layer w0.2: v1(11.5,12.7) 11.8,13 17.5,13 17.9,12.6 B*.2
  Bottom Layer w0.2: ISP1.4@10.84,4.2 10.84,6.274 11.3,6.734 11.3,12.5 v1(11.5,12.7)
NetB*_10: B*.10 C9.2 Y1.2 | length 9.4
  Top Layer w0.2: C9.2@18.5,3.919 19.799,2.62 Y1.2 ; C9.2 19.363,3.75 20.55,3.75 21.802,5.002 B*.10
NetB*_11: B*.11 C7.2 Y1.1 | length 7.9
  Top Layer w0.2: B*.11 22.602,4.998 23.65,3.95 23.65,3.919 23.847,3.919 Y1.1 25.32,2.794 C7.2
NetB*_21: B*.21 C6.2 | length 2.7
  Top Layer w0.2: B*.21 C6.2
NetC1_1: C1.1 D1.2 U1.3 | length 10.2
  Top Layer w1: D1.2@2.65,24.5 2.65,23.85 4.55,21.95 4.55,21.3 C1.1 9.3,21.3 U1.3
NetC3_1: C3.1 D2.2 U2.1 | length 7.5
  Top Layer w1: D2.2@2.65,16.2 2.65,15.7 4.55,13.8 4.55,13.2 U2.1
NetC16_2: C16.2 U3.6 | length 3.5
  Top Layer w0.3: C16.2@34.7,30.9 35.5,30.9 36.895,29.505 U3.6
NetC17_1: C17.1 R8.2 U3.7 | length 7.3
  Top Layer w0.3: C17.1@29.8,30.85 31.7,30.85 31.8,30.95 32.95,29.8 35.5,29.8 35.625,29.675 U3.7
NetC17_2: C17.2 R9.2 U3.8 | length 4.6
  Top Layer w0.3: C17.2@29.8,28.95 31.642,28.95 31.792,28.8 U3.8
NetL1_2: L1.2 Q1.3 R6.2 U3.3 | length 9.7
  Top Layer w0.5: U3.3 40.705,31.632 39.537,32.8 39.4,32.8 R6.2 L1.2 39.4,34.6 Q1.3@42.7,34.6
NetQ1_1: Q1.1 U3.2 | length 3.7
  Top Layer w0.2: Q1.1 41.75,31.25 41.975,31.025 U3.2
NetR4_2: R4.2 U4.1 U4.2 | length 5.5
  Top Layer w0.3: U4.2@13.51,30 14.78,30 14.78,34.12 R4.2@14.7,34.2
NetR6_1: R6.1 R7.2 U3.4 | length 4
  Top Layer w0.3: R7.2@37.5,30.9 39.4,30.9 39.435,30.865 U3.4
NetR11_2: R11.2 U7.1 U7.2 | length 6.5
  Top Layer w0.3: R11.2 57.51,32.99 U7.2 U7.1
RST: B*.31 ISP1.5 | length 23.5
  Top Layer w0.2: ISP1.5@13.38,1.66 v1(17.2,1.66) ; v1(18.8,16.4) 21.3,16.4 21.802,15.898 B*.31
  Bottom Layer w0.2: v1(17.2,1.66) 17.2,5.1 18.8,6.7 v1(18.8,16.4)
SCK: B*.12 ISP1.3 | length 21.1
  Top Layer w0.2: v1(12,5.9) 19.4,5.9 v1(20.5,4.8) ; v1(21.3,8.3) 22.7,8.3 23.402,7.598 B*.12
  Bottom Layer w0.2: ISP1.3@10.84,1.66 12,2.82 v1(12,5.9) ; v1(20.5,4.8) 21.3,5.6 v1(21.3,8.3)
Shock: B*.16 C8.1 R4.1 R5.2 Shock1.1 | length 59.7
  Top Layer w0.2: R5.2@10.7,34.2 12.9,34.2 14.7,36 14.7,37.6 15.1,38 v1(28.8,38) 28.8,35.8 Shock1.1 ; B*.16 26.602,5.398 27.3,4.7 v1(27.5,4.7)
  Bottom Layer w0.2: v1(27.5,4.7) 28.3,4.7 28.8,5.2 v1(28.8,38)
SIG_Shock: P2.2 R2.2 U4.3 | length 16.2
  Top Layer w0.254: R2.2@8.7,34.2 8.7,33.235 10.135,31.8 v1(12.2,31.8) U4.3@12.2,29.7
  Bottom Layer w0.254: P2.2 11.938,32.062 v1(12.2,31.8)
SIG_Temp_H: P5.2 R12.2 U7.3 | length 20.4
  Top Layer w0.3: R12.2 v1(51.8,37.069) ; P5.2 53.617,39.46 v1(56.24,39.46) ; U7.3 v1(56.24,30.5)
  Bottom Layer w0.3: v1(51.8,37.069) 52.31,37.579 P5.2 ; v1(56.24,30.5) v1(56.24,39.46)
Temp: C24.1 R11.1 R13.2 Temp1.1 | length 8.2
  Top Layer w0.3: R11.1 R13.2 ; Temp1.1 R13.2 ; C24.1 R13.2
VIN: D1.1 D2.1 P3.2 | length 53.5
  Top Layer w1: v1(4.5,17.5) 4.55,17.45 D2.1@4.55,16.2 ; v1(4.5,26.1) 4.5,24.55 D1.1@4.55,24.5 ; v1(4.5,45.2) 22.3,45.2 23.74,43.76 P3.2
  Bottom Layer w1: v1(4.5,17.5) v1(4.5,26.1) v1(4.5,45.2)
XOUT: B*.22 C20.1 P4.7 U5.5 | length 27.5
  Top Layer w0.2: B*.22 29.5,11.8 29.9,12.2 35.9,12.2 38.4,14.7 C20.1 40.2,13.5 ; U5.5 40.2,13.5 ; v1(45.6,13.4) 45.1,12.9 42.089,12.9 41.489,13.5 40.2,13.5
  Bottom Layer w0.2: v1(45.6,13.4) 45.6,9.17 P4.7
YOUT: B*.13 C19.1 P4.6 U5.4 | length 40.6
  Top Layer w0.2: B*.13 24.202,5.403 24.7,4.905 26.322,4.905 27.127,4.1 27.749,4.1 28.749,5.1 38.051,5.1 39.151,4 v1(45,4) ; U5.4 44.95,11.85 v1(45,11.8) 45.8,11.8 46.99,10.61 P4.6 ; v1(42.3,13.7) C19.1
  Bottom Layer w0.2: v1(42.3,11.9) v1(42.3,13.7) ; v1(45,4) v1(45,11.8)
ZOUT: B*.14 C18.1 P4.5 U5.16 | length 34.9
  Top Layer w0.2: B*.14 v1(25.002,7.8) ; v1(28.2,5.5) v1(38.5,5.5) ; U5.16 v1(40.2,8.7) 41.875,8.7 42.4,8.175 C18.1 ; v1(41.64,12.5) 45.3,12.5 45.5,12.7 46.83,12.7 P4.5
  Bottom Layer w0.2: v1(25.002,7.8) 25.002,5.998 25.5,5.5 v1(28.2,5.5) ; v1(38.5,5.5) 38.5,7 v1(40.2,8.7) 41.64,10.14 v1(41.64,12.5)
pads on no net: B*.3 B*.8 B*.9 B*.15 B*.17 B*.18 B*.25 B*.26 B*.27 B*.28 B*.29 B*.30 B*.32 P1.4 P1.7 P1.8 P2.4 P2.None P3.None P4.2 P4.4 P5.None U2.4 U3.13 U4.5 U4.6 U4.7 U4.8 U4.9 U4.10 U4.12 U4.13 U4.14 U5.2 U5.8 U5.9 U5.10 U5.11 U5.12 U5.13 U6.4 U7.5 U7.6 U7.7 U7.8 U7.9 U7.10 U7.12 U7.13 U7.14

## Polygon pours and split planes (outlines as drawn)
GND on Bottom Layer "Bottom Layer-No Net" (solid, remove dead copper, pour order 2): 0,50 65,50 65,0 0,0
GND on Top Layer "Bottom Layer-No Net" (solid, remove dead copper, pour order 4): 0,50 65,50 65,0 49.9,0 -0.1,0

## Keep-outs
Keep-Out Layer:
  the board outline again, w1

## Other copper
Top Layer:
  region net +5V: 15.8,34.8 21.3,34.8 21.3,33.5 15.8,33.5

## Dimensions
62.5,47.5 to 62.5,2.5 on Mechanical 3
2.5,2.5 to 62.5,2.5 on Mechanical 3
65,50 to 65,0 on Mechanical 3
0,0 to 65,0 on Mechanical 3

## Text inside footprints (layer, text, board x,y; h text height)
ISP1: Top Overlay "6" at 14.864,3.832 h1.27; Top Overlay "5" at 14.864,1.292 h1.27; Top Overlay "2" at 5.72,3.832 h1.27; Top Overlay "1" at 6.228,1.292 h1.27